# Altium PCB External_IMU.PcbDoc
Units mm, origin at the board's own origin, x right, y up, seen from the top; angles counter-clockwise.
Board outline 60.07 x 30.1 mm, 4 copper layers (Top Layer, GND, PWR, Bottom Layer), stack 0.603 mm thick; 25 components, 19 nets, 124 pads, 62 vias.
Unrouted connection lines stored in the file: 27.
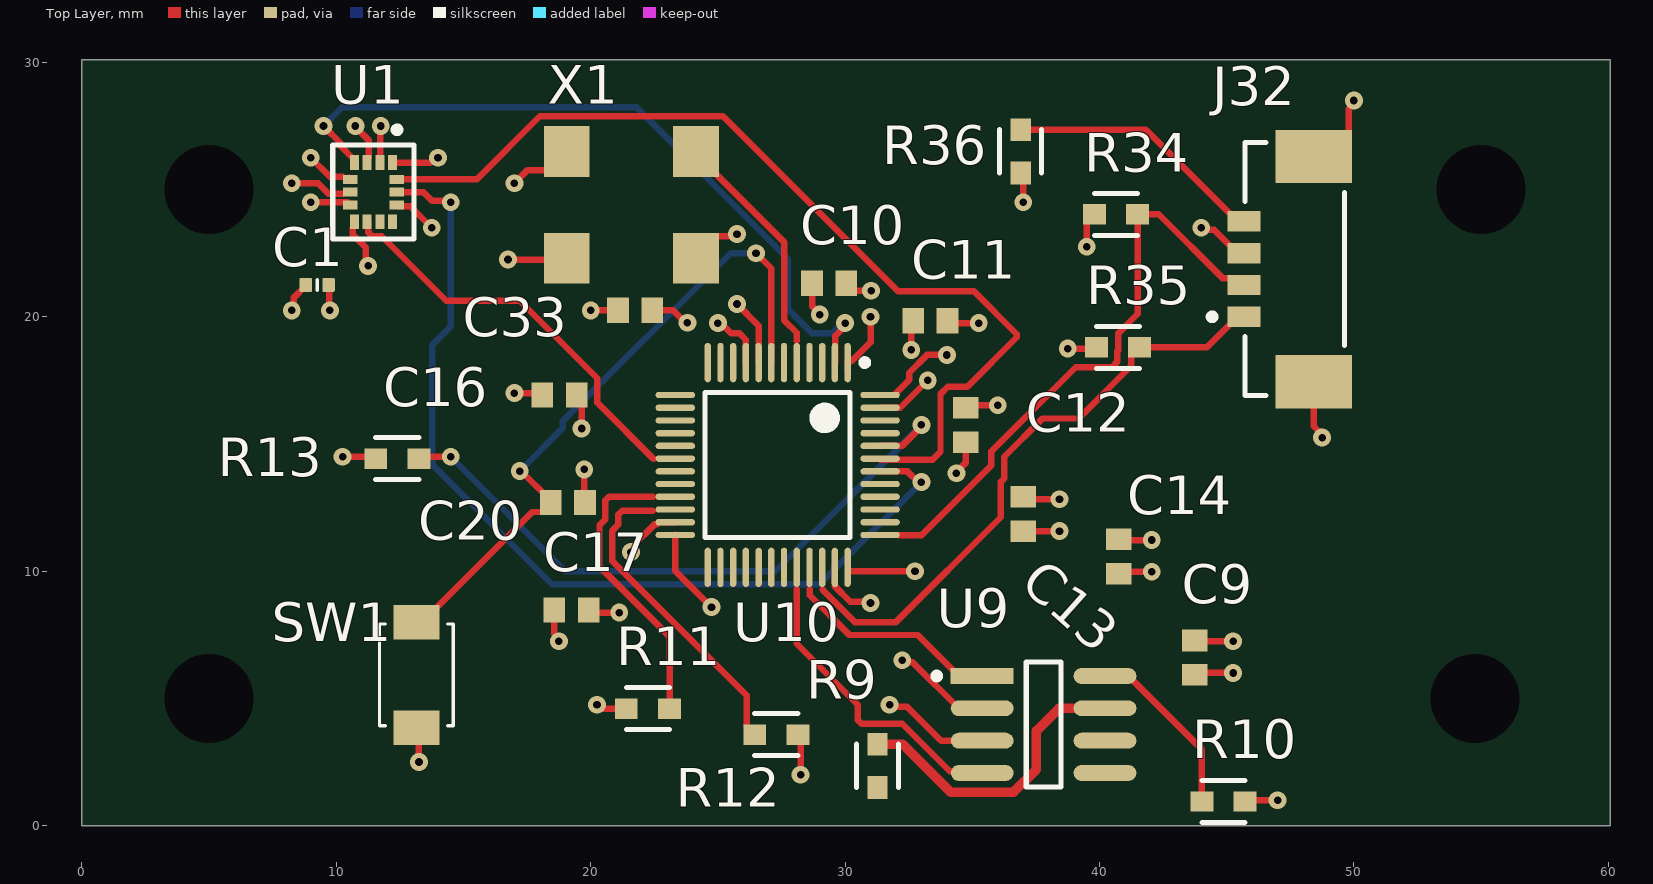
[diagram p0: Top Layer view]
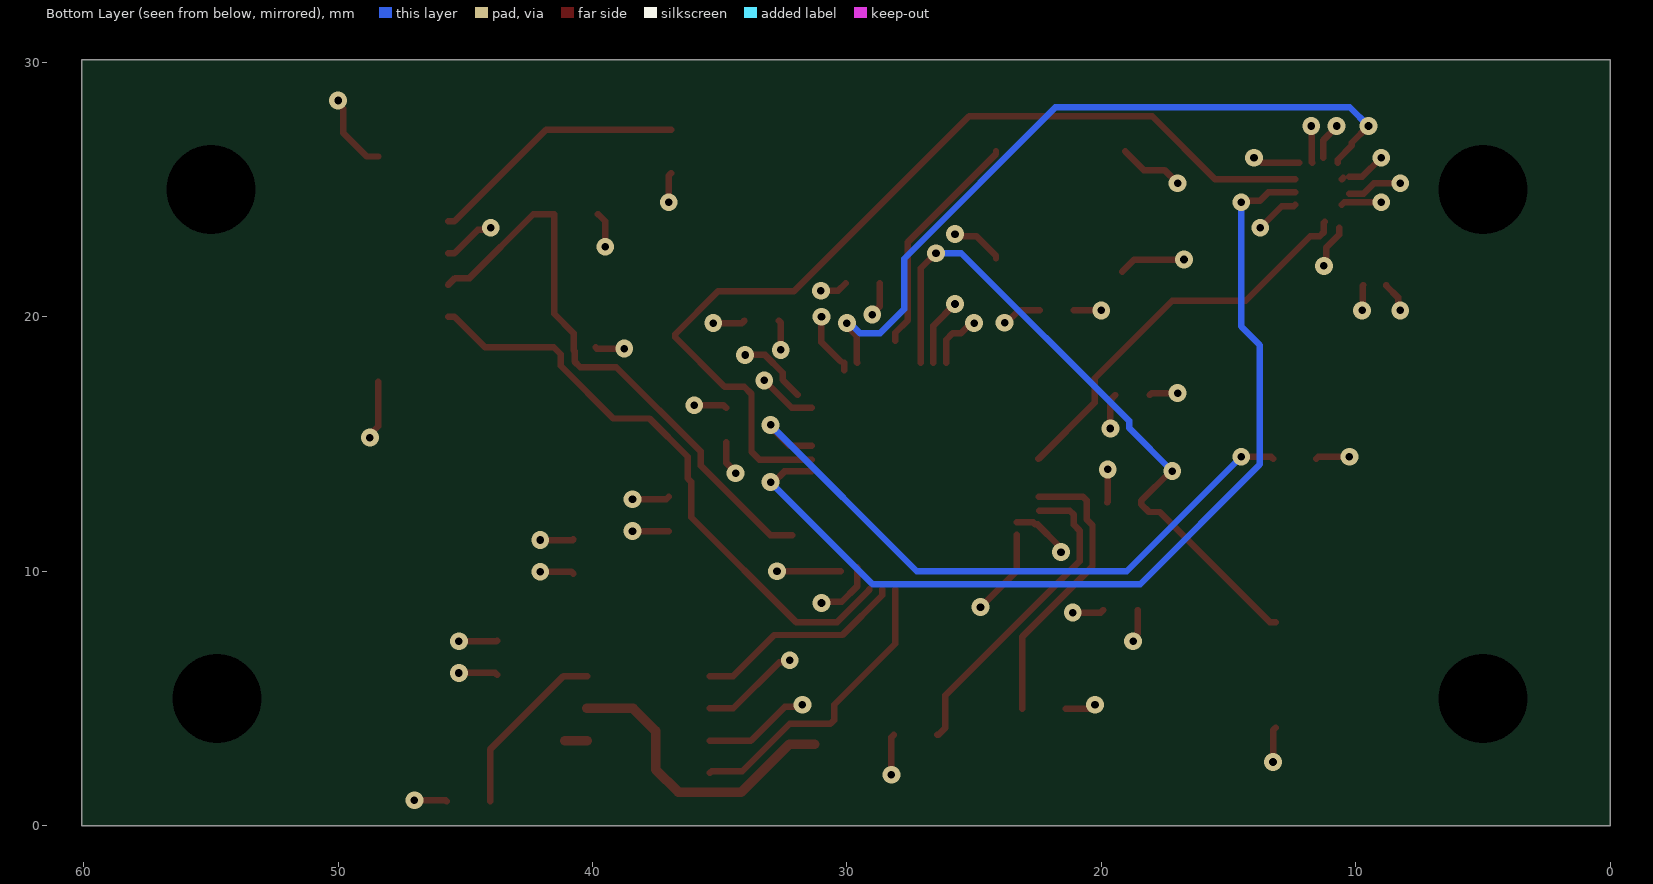
[diagram p1: Bottom Layer view, seen from below]
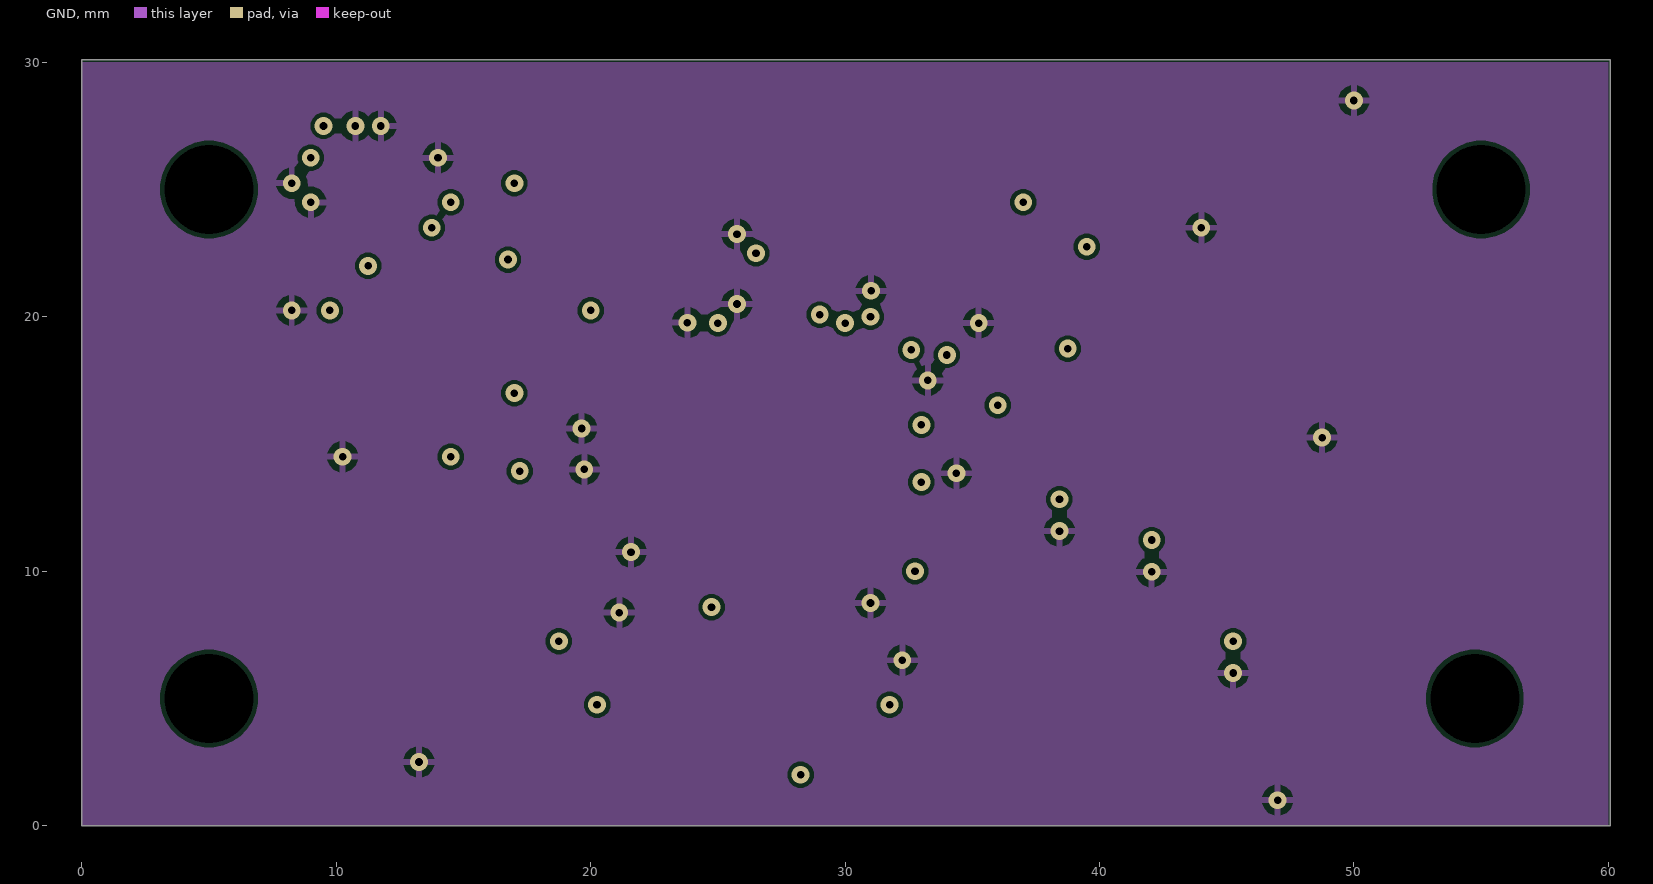
[diagram p2: GND]
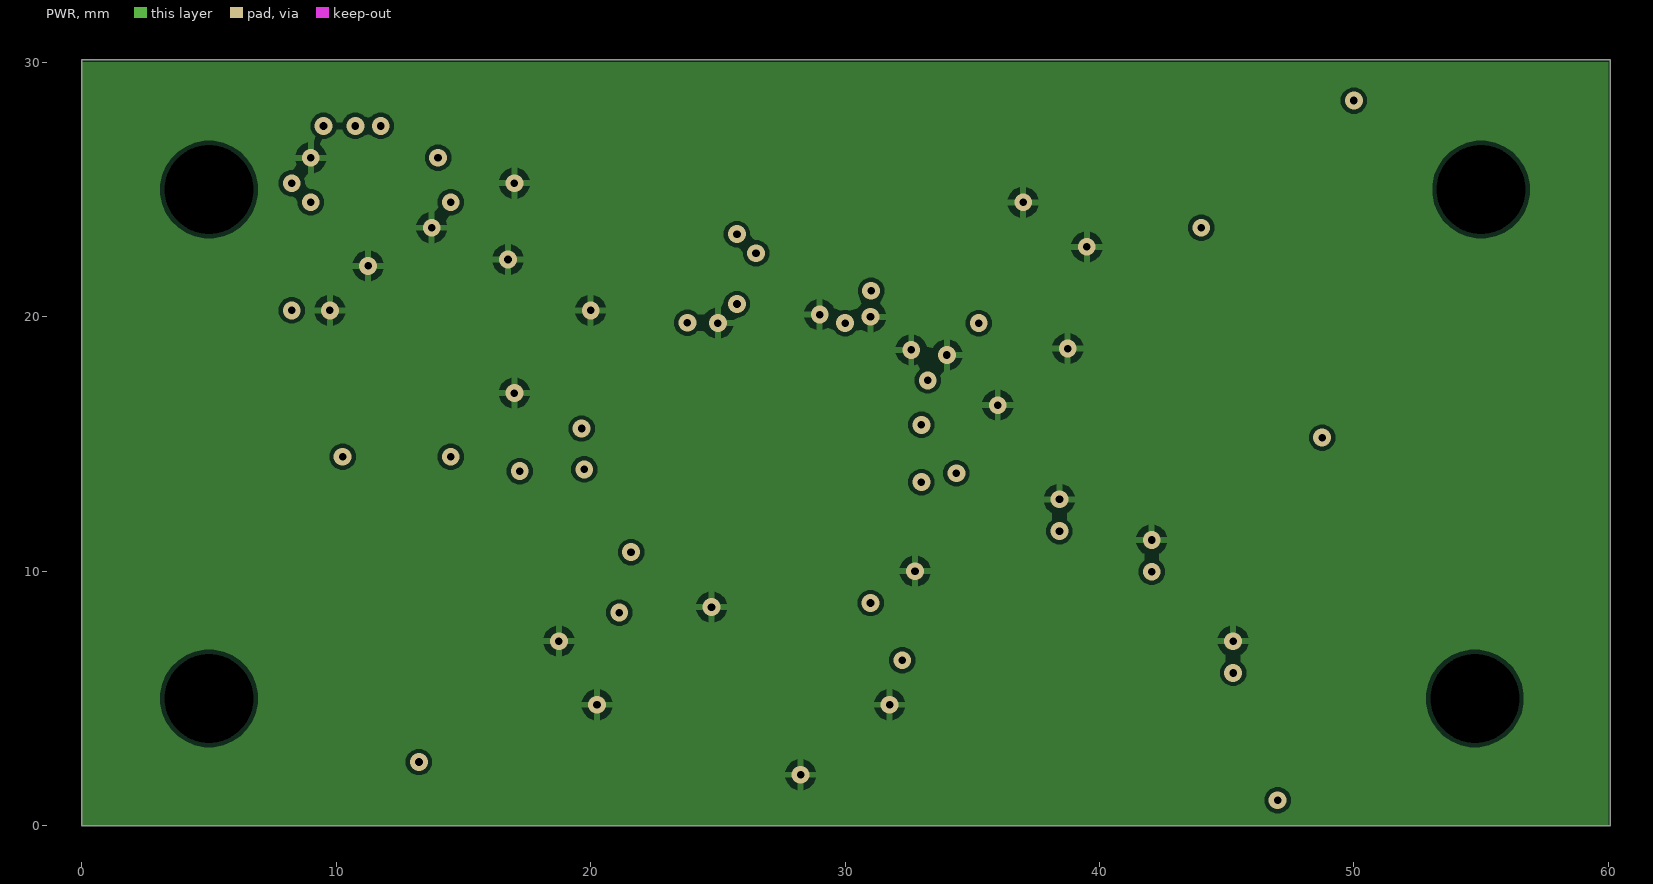
[diagram p3: PWR]
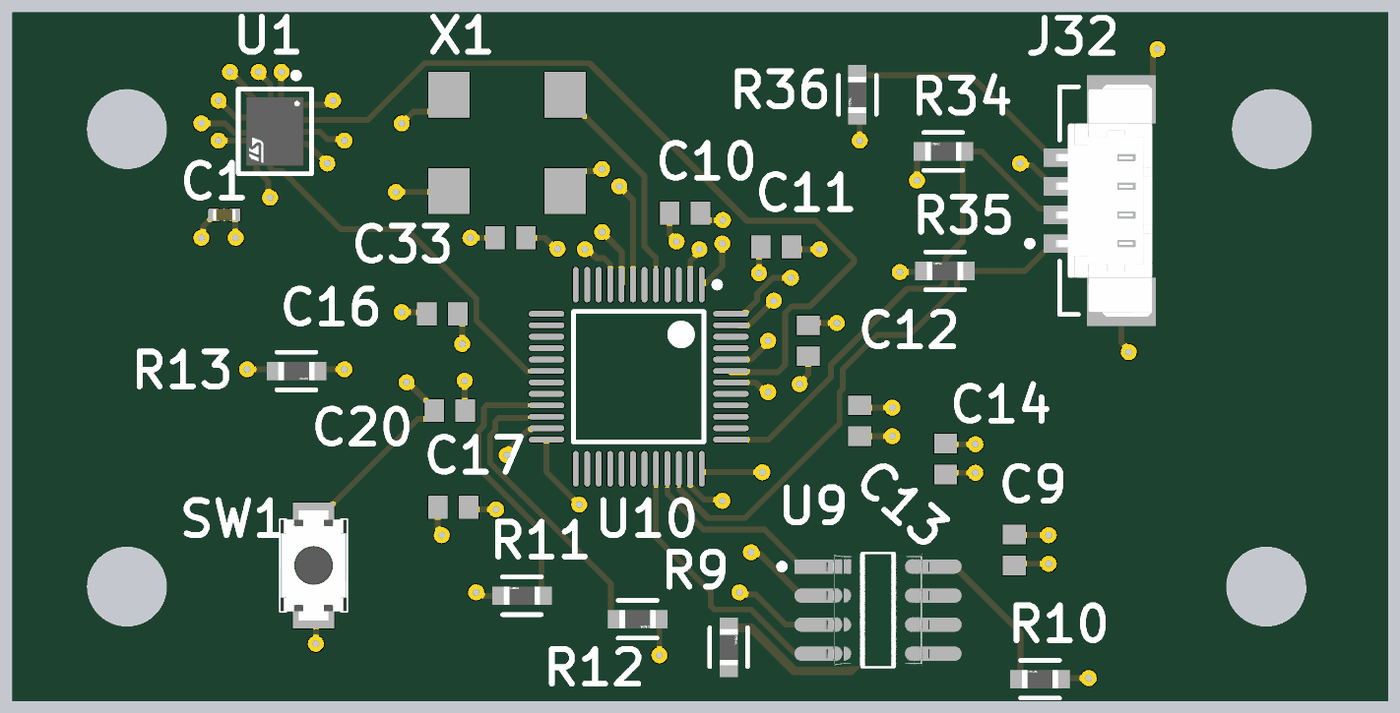
[diagram p4: 3D render of the assembled board from above, using the file's embedded part models]

## Layer stack, top to bottom
Top Solder: solder mask 0.0102, Solder Resist, Dk 3.5
Top Layer: signal copper 0.0356
Dielectric 2: prepreg 0.0711, PP-006, Dk 4.1
GND: signal copper 0.035
Dielectric 1: dielectric 0.32, FR-4, Dk 4.8
PWR: signal copper 0.035
Dielectric 3: prepreg 0.0711, PP-006, Dk 4.1
Bottom Layer: signal copper 0.0356
Bottom Solder: solder mask 0.0102, Solder Resist, Dk 3.5

## Board outline
0,0 0,30.099 60.071,30.099 60.071,0

## Design rules (kind name [scope] priority, off if disabled: settings)
Clearance [All] p1: gap=0.16 ignorepadtopadclearanceinfootprint=TRUE
DiffPairsRouting [All] p1: maxlimit=0.254 minlimit=0.254 mostfreqgap=0.254 toplayer_minwidth=0.381 toplayer_maxwidth=0.381 toplayer_prefwidth=0.381 midlayer1_minwidth=0.381 midlayer1_maxwidth=0.381 midlayer1_prefwidth=0.381 midlayer2_minwidth=0.381 midlayer2_maxwidth=0.381 midlayer2_prefwidth=0.381 bottomlayer_minwidth=0.381 bottomlayer_maxwidth=0.381 bottomlayer_prefwidth=0.381 maxuncoupledlength=12.7
HoleSize [All] p1: absolutevalues=TRUE maxlimit=3.5 minlimit=0.025 maxpercent=80.000 minpercent=20.000
MinimumSolderMaskSliver [All] p1: minsoldermaskwidth=0.075
PolygonConnect [All] p1: connectstyle=Relief reliefconductorwidth=0.254 reliefentries=4 polygonreliefangle="90 Angle" airgapwidth=0.254
RoutingVias [All] p1: holewidth=0.711 width=1.27 viastyle="Through Hole" minholewidth=0.711 minwidth=1.27 maxholewidth=0.711 maxwidth=1.27
SilkToSolderMaskClearance [IsPad] p1: minsilkscreentomaskgap=0.1 clearancetoexposedcopper=TRUE
SolderMaskExpansion [All] p1: expansion=0.05 istentingtop=FALSE
SupplyNets "Schematic Supply Nets_1" [InNet('+3V3')] p1: voltage=0.000
SupplyNets "Schematic Supply Nets" [InNet('GND')] p2: voltage=0.000
Width [All] p1: maxlimit=0.254 minlimit=0.254 preferedwidth=0.254
26 further rules are at their usual default settings.

## Classes and differential pairs
differential pair CAN: +CAN_P -CAN_N

## Components (designator, comment, footprint, x,y, rotation, side; value= is the part's Value field where it differs from the comment)
C1 "Capacitor 100nF +/-20% 10V 0402" CAPC0402(1005)60_L 9.25,21.25 r0 top value=100nF
C9 "100nF" CAPC1608X92X38NL15T08 43.75,6.6 r90 top
C10 "10uF" CAPC1608X92X38NL15T08 29.375,21.325 r180 top
C11 "100nF" CAPC1608X92X38NL15T08 33.35,19.85 r180 top
C12 "100nF" CAPC1608X92X38NL15T08 34.75,15.75 r90 top
C13 "100nF" CAPC1608X92X38NL15T08 37,12.25 r90 top
C14 "100nF" CAPC1608X92X38NL15T08 40.75,10.575 r90 top
C16 "1µF" CAPC1608X92X38NL15T08 18.775,16.925 r180 top
C17 "100nF" CAPC1608X92X38NL15T08 19.25,8.475 r180 top
C20 "100nF" CAPC1608X92X38NL15T08 19.1,12.7 r180 top
C33 "100nF" CAPC1608X92X38NL15T08 21.75,20.25 r180 top
J32 "533980471" FP-533980471-MFG 47.675,21.875 r270 top
R9 "120" FP-AC0603-MFG 31.275,2.35 r90 top
R10 "0" FP-AC0603-MFG 44.875,0.95 r180 top
R11 "4.7k" FP-AC0603-MFG 22.25,4.6 r180 top
R12 "4.7k" FP-AC0603-MFG 27.3,3.575 r0 top
R13 "10k" FP-AC0603-MFG 12.4,14.425 r0 top
R34 "4.7k" FP-AC0603-MFG 40.65,24.025 r180 top
R35 "4.7k" FP-AC0603-MFG 40.725,18.8 r180 top
R36 "0" FP-AC0603-MFG 36.9,26.5 r270 top
SW1 "" SW_TS-1088-AR02016 13.15,5.925 r270 top
U1 "ISM330DHCXTR" FP-LGA-14L-DM00249496-MFG 11.462,24.9 r270 top
U9 "SN65HVD230DR" FP-D0008A-IPC_A 37.8,3.975 r0 top
U10 "STM32F103C8T6" STM-LQFP48_L 27.35,14.175 r270 top
X1 "CMP-003-00036-2" X1G004481001412-Footprint-1 21.6,24.4 r0 top

## Footprints (in the part's own frame and the unit in brackets; to place one, negate y for a bottom-side part, rotate by r counter-clockwise, add the part's x,y. Pads: shape width x height; smd on the part's side, far side on the other; paste and mask are expansions set on the pad)
CAPC0402(1005)60_L [mm] "Chip Capacitor, Body 1.0x0.5mm, Height 0.6mm, IPC High Density"
  rrect25% 0.5x0.55 smd: 1(-0.45,0) 2(0.45,0)
  silkscreen extent 0,-0.2 0,0.2, body extent -0.5,-0.25 0.5,0.25, height 0.6
CAPC1608X92X38NL15T08 [mm] "Chip Capacitor, 2-Leads, Body 1.60x0.80mm, IPC Medium Density"
  rect 0.85x1 smd: 1(-0.675,0) 2(0.675,0)
  body extent -0.87,-0.48 0.87,0.47, height 0.92
FP-533980471-MFG [mm]
  rect 0.8x1.3 smd paste+0 mask+0: 1(1.875,-2) 2(0.625,-2) 3(-0.625,-2) 4(-1.875,-2)
  rect 2.1x3 smd paste+0 mask+0: 5(-4.425,0.75) 6(4.425,0.75)
  silkscreen extent -4.97,-3.37 4.97,1.95, body extent -5.58,-2.75 5.58,2.35, height 0.25
FP-AC0603-MFG [mm]
  rect 0.9x0.8 smd paste+0 mask+0: 1(-0.85,0) 2(0.85,0)
  silkscreen extent -0.85,-0.82 0.85,0.82, body extent -1.4,-0.55 1.4,0.55, height 0.25
FP-D0008A-IPC_A [mm]
  rect 2.469x0.622 smd paste+0 mask+0: 1(-2.414,1.905)
  rrect100% 2.469x0.622 smd paste+0 mask+0: 2(-2.414,0.635) 3(-2.414,-0.635) 4(-2.414,-1.905) 5(2.414,-1.905) 6(2.414,-0.635) 7(2.414,0.635) 8(2.414,1.905)
  silkscreen extent -4.32,-2.45 0.68,2.45, body extent -4.15,-2.95 4.15,2.95, height 0.25
FP-LGA-14L-DM00249496-MFG [mm]
  rect 0.575x0.35 smd paste-1000 mask+0: 1(-1.162,0.75) 2(-1.162,0.25) 3(-1.162,-0.25) 4(-1.162,-0.75) 8(1.162,-0.75) 9(1.162,-0.25) 10(1.162,0.25) 11(1.162,0.75)
  rect 0.35x0.575 smd paste-1000 mask+0: 5(-0.5,-0.913) 6(0,-0.913) 7(0.5,-0.913) 12(0.5,0.913) 13(0,0.913) 14(-0.5,0.913)
  silkscreen extent -2.57,-1.6 1.85,1.6, body extent -2.05,-1.8 2.05,1.8, height 0.25
STM-LQFP48_L [mm] "QFP, 48-Leads, Body 7x7mm, Pitch 0.5mm, IPC High Density"
  oval 1.55x0.25 smd: 1(-4.025,2.75) 2(-4.025,2.25) 3(-4.025,1.75) 4(-4.025,1.25) 5(-4.025,0.75) 6(-4.025,0.25) 7(-4.025,-0.25) 8(-4.025,-0.75) 9(-4.025,-1.25) 10(-4.025,-1.75) 11(-4.025,-2.25) 12(-4.025,-2.75) 25(4.025,-2.75) 26(4.025,-2.25) 27(4.025,-1.75) 28(4.025,-1.25) 29(4.025,-0.75) 30(4.025,-0.25) 31(4.025,0.25) 32(4.025,0.75) 33(4.025,1.25) 34(4.025,1.75) 35(4.025,2.25) 36(4.025,2.75)
  oval 0.25x1.55 smd: 13(-2.75,-4.025) 14(-2.25,-4.025) 15(-1.75,-4.025) 16(-1.25,-4.025) 17(-0.75,-4.025) 18(-0.25,-4.025) 19(0.25,-4.025) 20(0.75,-4.025) 21(1.25,-4.025) 22(1.75,-4.025) 23(2.25,-4.025) 24(2.75,-4.025) 37(2.75,4.025) 38(2.25,4.025) 39(1.75,4.025) 40(1.25,4.025) 41(0.75,4.025) 42(0.25,4.025) 43(-0.25,4.025) 44(-0.75,4.025) 45(-1.25,4.025) 46(-1.75,4.025) 47(-2.25,4.025) 48(-2.75,4.025)
  silkscreen extent -4.15,-2.85 2.85,3.55, body extent -3.5,-3.5 3.5,3.5, height 1.6
SW_TS-1088-AR02016 [mm]
  rect 1.35x1.8 smd: 1(-2.075,0) 2(2.075,0)
  silkscreen extent -2,-1.45 2,1.45, body extent -2.4,-1.45 2.4,1.45, height 2
X1G004481001412-Footprint-1 [mm]
  rect 1.8x2 smd: 1(-2.54,-2.1) 2(2.54,-2.1) 3(2.54,2.1) 4(-2.54,2.1)
  body extent -3.5,-2.5 3.5,2.5, height 1.3

## Part data
C1: library part CMP-001-00061-3, "Chip Capacitor, 100nF +/-20%, 10V, 0402, Thickness 0.6 mm", Case/Package=0402, Max Operating Temperature=85°C, Min Operating Temperature=-55°C, Tolerance=20%, Voltage Rating=10V, Mounting Technology=SMT, Pins=2
C9 C10 C11 C12 C13 C14 C16 C17 C20 C33: library part CMP-2006-01140-1, "Generic Capacitor 0603", Manufacturer=Generic
J32: library part CMP-04776-000105-1, "CONN HEADER SMD 4POS 1.25MM", Ambient Temperature Range High=+105°C, Ambient Temperature Range Low=-40°C, Current Rating=1A, Manufacturer=Molex, Package=0, Temperature="-40°C to +105°C", Voltage Rating=125V, Automotive=No, Category=Conn, ComponentLink2Description=Datasheet, ComponentLink2URL=https://www.molex.com/pdm_docs/ps/PS-51021-024-001.pdf, Conn Gender=Male, Conn Orientation=Vertical, Contact Material=Tin, Device Class L1=Connectors, Device Class L2="Headers and Wire Housings", Device Class L3=unset, Digikey Description="CONN HEADER SMD 4POS 1.25MM", Footprint Url=https://www.molex.com/pdm_docs/sd/533980471_sd.pdf, Height=5.1mm, Lead Free=Yes, Manufacturer Part Number=533980471, Number Of Contacts=4, Number Of Rows=1, Octopart=https://octopart.com/53398-0471-molex-655296, Pitch=1.25mm, RoHS=TRUE, Standoff Height=0.05mm, Temperature Range High=+105°C, Temperature Range Low=-40°C
R9 R10 R11 R12 R13 R34 R35 R36: library part CMP-03412-004865-2, "Generic RES 0603", Case/Package=0603
  R9: Resistance=120
  R10 R36: Resistance=0
  R11 R12 R34 R35: Resistance=4.7k
  R13: Resistance=10k
SW1: library part CMP-005-000000-1, "50mA 4mm 100MÎ© 100,000 Times 12V 160gf 3mm 2mm Round Button Vertical welding SPST SMD Tactile Switches ROHS", Package=Package, Check_prices=https://www.snapeda.com/parts/TS-1088-AR02016/Xunpu/view-part/?ref=eda, Component Type=Standard, Design Item ID=TS-1088-AR02016, MF=Xunpu, MP=TS-1088-AR02016, Pin Count=2, SnapEDA_Link=https://www.snapeda.com/parts/TS-1088-AR02016/Xunpu/view-part/?ref=snap, Source=TS-1088-AR02016.SchLib
U1: library part CMP-12177-000014-1, "INEMO INERTIAL MODULE: ALWAYS-ON"
U9: library part CMP-0315-00015-3, "IC TRANSCEIVER HALF 1/1 8SOIC", Case/Package=D, Max Operating Temperature=85°C, Max Supply Current=17mA, Max Supply Voltage=3.6V, Min Operating Temperature=-40°C, Min Supply Voltage=3V, Operating Supply Voltage=3.3V, Package Quantity=1, Contact Plating=Gold, Data Rate=1Mbps, Lead Free="Lead Free", Nominal Supply Current=17mA, Number of Drivers=1, Number of I/Os=2, Number of Pins=8, Number of Receive Buffers=1, Number of Receivers=1, Number of Transceivers=1, Number of Transmit Buffers=1, Packaging="Tape and Reel", Radiation Hardening=No, REACH SVHC="No SVHC", Termination=SMD/SMT, Weight=0.002561oz
U10: library part CMP-0237-00215-3, "ARM Cortex-M3 32-bit MCU, 64 KB Flash, 20 KB Internal RAM, 37 I/Os, 48-pin LQFP, -40 to 85 degC, Tray", I/Os (High Current)=37, Operating Frequency(F) (Processor speed) (MHz)=72, Supply Voltage(Vcc) min (V)=2, A/D Converter="2x12-bit (10 Channel)", ComponentLink1Description="Manufacturer URL", ComponentLink1URL=http://www.st.com/web/en/home.html, ComponentLink2Description=Datasheet, ComponentLink2URL=http://www.st.com/st-web-ui/static/active/en/resource/technical/document/datasheet/CD00161566.pdf, ComponentLink3Description="Package Specification", ComponentLink3URL=http://www.st.com/st-web-ui/static/active/en/resource/technical/document/datasheet/DM00058181.pdf, Core="ARM Cortex-M3", DatasheetVersion="Rev. 16", FLASH Size (Prog) (kB)=64, Internal RAM Size (kB)=20, Mounting Technology="Surface Mount", PackageDescription="48-Pin Low Profile Quad Flat Package, 7 x 7 mm Body, 0.5 mm Pitch", PackageReference=LQFP48, PackageVersion="Rev. 6, 06/2013", Packing=Tray, PartNumber=STM32F103C8T6
X1: library part CMP-003-00032-1, "Crystal Oscillator 8MHz 1.6V to 3.6V 15pF 4-Pin SMD T/R", Frequency=8MHz, Load Capacitance=15pF, Max Operating Temperature=85°C, Min Operating Temperature=-40°C, Component Type=Standard, Design Item ID=CMP-003-00036-2, Mounting Technology="Surface Mount", Pins=4, Source="Components - 07.02.26 - 15.45.SchLib"

## Free pads (board coordinates)
  round 1.524 hole 3.5 unplated: 2(5,5) 2(5,25) 2(54.75,5) 2(55,25)

## Via types
v1: diameter 0.7, hole 0.3, Top Layer to Bottom Layer, 62 vias

## Nets (pads, with @x,y where several pads share a name; then routed paths per layer and width w, separated by ;. In a path a pad name is that pad's centre, name@x,y a point inside that pad or via, vN(x,y) a via of type N, cw(c..) or ccw(c..) an arc to the next point about the centre after c; other vN are vias at no path point)
+3V3: C1.2 C9.2 C10.2 C11.2 C12.2 C13.2 C14.2 C16.2 C17.2 C33.2 R11.2 R12.2 R34.2 R35.2 R36.2 U1.5 U1.8 U1.12 U9.3 U10.1 U10.9 U10.24 U10.36 U10.48 X1.1 X1.4 | length 47.2
  Top Layer w0.254: v1(9,26.25) 9.002,26.25 9.752,25.5 10.25,25.5 ; C1.2 9.725,21.225 9.725,20.275 v1(9.75,20.25) ; U1.5@10.494,25.456 U1.5 ; U1.8@10.656,23.5 10.656,23.222 11.165,22.714 11.165,22.085 v1(11.25,22) ; U1.12 12.431,24.344 12.906,24.344 v1(13.75,23.5) ; v1(16.75,22.25) 18.703,22.25 X1.1@19.177,21.776 ; v1(17,17) 18.025,17 C16.2 ; v1(17,25.25) 17.517,25.767 18.327,25.767 X1.4 ; C17.2 18.575,7.546 18.75,7.371 v1(18.75,7.25) ; v1(20,20.25) C33.2 ; v1(20.25,4.75) 20.371,4.75 20.521,4.6 R11.2 ; U10.24 23.325,10.012 v1(24.75,8.587) ; v1(25,19.75) 25.121,19.75 25.515,19.356 25.845,19.356 26.1,19.101 U10.9 ; R12.2 28.25,3.475 v1(28.25,2) ; C10.2 28.7,20.421 29,20.121 v1(29,20.087) ; U10.1@30.1,17.906 U10.1 ; 30.25,10 v1(32.75,10) ; 30.25,18.25 31,19 v1(31,20) ; v1(31.75,4.75) 31.835,4.665 32.446,4.665 33.771,3.34 U9.3 ; U10.48@31.927,16.927 32.519,17.519 32.519,17.803 33.216,18.5 v1(34,18.5) ; v1(32.6,18.7) 32.6,19.775 C11.2 ; C12.2 34.85,16.525 v1(36,16.525) ; R36.2 37,25.55 v1(37,24.5) ; C13.2 37.1,12.825 v1(38.425,12.825) ; v1(38.75,18.75) 39.825,18.75 R35.2 ; v1(39.5,22.75) 39.5,23.752 39.773,24.025 R34.2 ; C14.2 40.775,11.225 v1(42.05,11.225) ; C9.2 43.775,7.25 v1(45.25,7.25)
CAN_N: U9.6 | length 0.9
  Top Layer w0.381: U9.6 U9.6@41.09,3.34
CAN_P: R9.2 U9.7 | length 12
  Top Layer w0.381: R9.2 32.264,3.2 34.15,1.314 36.623,1.314 37.515,2.207 37.515,3.718 38.408,4.61 U9.7
CAN_RX: U9.4 U10.32 | length 11.9
  Top Layer w0.254: 28.1,9.284 28.1,7.15 30.5,4.75 30.5,4.149 30.649,4 32.25,4 34.11,2.14 35.316,2.14 U9.4
CAN_TX: U9.1 U10.33 | length 8.3
  Top Layer w0.254: 28.608,9.284 28.608,9.058 30.174,7.492 32.851,7.492 34.463,5.88 U9.1
GND: C1.1 C9.1 C10.1 C11.1 C12.1 C13.1 C14.1 C16.1 C17.1 C20.1 C33.1 J32.3 J32.5 J32.6 R10.1 R13.1 SW1.2 U1.1 U1.2 U1.3 U1.6 U1.7 U9.2 U10.8 U10.23 U10.35 U10.47 X1.2 | length 50.6
  Top Layer w0.254: v1(8.25,20.25) 8.335,20.335 8.335,20.76 8.8,21.225 C1.1 ; v1(8.25,25.25) 9.284,25.25 9.69,24.844 10.25,24.844 ; v1(9,24.5) 10.45,24.5 U1.7 ; v1(10.25,14.5) 11.475,14.5 R13.1 ; v1(10.75,27.5) 10.75,27.466 11.268,26.948 U1.3@11.268,26.25 ; U1.2 11.731,26.081 11.731,27.481 v1(11.75,27.5) ; U1.1 13.692,26.062 13.879,26.25 v1(14,26.25) ; SW1.2 13.25,3.75 v1(13.25,2.5) ; C16.1 19.642,16.733 v1(19.642,15.608) ; v1(19.75,14) 19.75,12.725 C20.1 ; C17.1 20.026,8.374 v1(21.124,8.374) ; v1(21.586,10.75) 21.672,10.835 21.672,11.004 22.504,11.837 22.591,11.837 22.679,11.925 U10.23 ; C33.1 23.25,20.25 23.731,19.769 v1(23.803,19.769) ; X1.2 24.14,22.4 24.913,23.173 25.673,23.173 v1(25.75,23.25) ; v1(25.75,20.5) 26.6,19.65 U10.8 ; U10.35 29.602,10.148 29.602,9.398 30.199,8.801 30.949,8.801 v1(31,8.75) ; C10.1 30.05,21.321 30.348,21.023 v1(31.023,21.023) ; U10.47 31.711,16.425 31.717,16.419 32.169,16.419 v1(33.25,17.5) ; v1(32.25,6.5) 32.335,6.415 32.658,6.415 34.463,4.61 U9.2 ; C11.1 34.125,19.75 v1(35.25,19.75) ; v1(34.375,13.85) 34.375,13.894 34.75,14.269 C12.1 ; C13.1 v1(38.425,11.575) ; C14.1 40.825,9.975 v1(42.05,9.975) ; C9.1 43.825,6 v1(45.25,6) ; v1(44,23.5) 44.085,23.415 44.51,23.415 45.425,22.5 J32.3 ; R10.1 45.775,1 v1(47,1) ; J32.6 48.425,15.696 48.75,15.371 v1(48.75,15.25) ; J32.5 48.875,26.3 49.798,27.223 49.798,28.177 50,28.379 v1(50,28.5)
INT1: U1.4 U10.2 | length 29.5
  Top Layer w0.254: v1(9.5,27.5) 10.155,26.845 10.155,26.732 10.712,26.175 U1.4 ; U10.2 29.606,18.206 29.606,19.235 30,19.629 v1(30,19.75)
  Bottom Layer w0.254: v1(9.5,27.5) 10.231,28.231 21.803,28.231 27.75,22.284 27.75,20.303 28.697,19.356 29.485,19.356 29.879,19.75 v1(30,19.75)
INT2: U1.9 U10.18 | length 15.9
  Top Layer w0.254: U1.9 11.25,23.7 11.25,23.331 11.419,23.163 11.787,23.163 14.319,20.631 17.207,20.631 20.256,17.583 20.256,16.628 22.472,14.412
NetC20_2: C20.2 SW1.1 U10.7 | length 26.6
  Top Layer w0.254: SW1.1 13.375,8 17.702,12.327 18.127,12.327 18.425,12.625 C20.2 18.425,12.775 17.267,13.933 v1(17.209,13.933) ; v1(26.5,22.5) 27.094,21.906 27.094,18.206 U10.7
  Bottom Layer w0.254: v1(17.209,13.933) 18.911,15.634 18.911,15.911 25.5,22.5 v1(26.5,22.5)
NetJ32_4: J32.4 R36.1 | length 10.3
  Top Layer w0.254: R36.1 41.825,27.35 45.425,23.75 J32.4
NetR10_2: R10.2 U9.8 | length 7
  Top Layer w0.254: U9.8 41.137,5.88 44.025,2.992 R10.2
NetR13_2: R13.2 U10.44 | length 26
  Top Layer w0.254: R13.2 13.325,14.5 v1(14.5,14.5) ; U10.44 32.241,14.925 33,15.684 v1(33,15.75)
  Bottom Layer w0.254: v1(14.5,14.5) 19,10 27.25,10 v1(33,15.75)
NetU10_5: U10.5 X1.3 | length 9.1
  Top Layer w0.254: X1.3 24.14,26.4 27.602,22.938 27.602,19.866 28.1,19.368 28.1,19.066
SCL: R11.1 U10.21 | length 11.4
  Top Layer w0.254: 22.459,12.933 20.73,12.933 20.581,12.784 20.581,12.042 20.347,11.808 20.347,10.184 23.1,7.432 R11.1
"SCL CLK": U1.13 U10.42 | length 37.5
  Top Layer w0.254: U1.13@12.375,24.892 13.432,24.892 13.769,24.555 14.445,24.555 v1(14.5,24.5) ; U10.42 U10.42@32.014,13.925 ; U10.42@32.016,13.923 32.456,13.923 32.879,13.5 v1(33,13.5)
  Bottom Layer w0.254: v1(14.5,24.5) 14.5,19.621 13.769,18.89 13.769,14.197 18.474,9.492 28.992,9.492 v1(33,13.5)
SDA: R12.1 U10.22 | length 12.5
  Top Layer w0.254: 22.438,12.378 21.238,12.378 21.089,12.229 21.089,11.832 20.855,11.598 20.855,10.395 26.127,5.123 26.127,3.848 26.4,3.575 R12.1
"SDA DATA": U1.14 U10.43 | length 37.8
  Top Layer w0.254: U1.14 15.521,25.4 18.002,27.881 25.198,27.881 32.079,21 35.066,21 36.75,19.316 36.75,19.19 34.81,17.25 34.034,17.25 33.75,16.966 33.75,14.69 33.438,14.378 U10.43@31.375,14.378
SW_CLK: J32.2 R34.1 U10.37 | length 23.1
  Top Layer w0.254: 32.15,11.419 33.016,11.419 35.75,14.153 35.75,14.707 39.062,18.019 40.483,18.019 40.706,18.242 40.706,18.649 40.744,18.687 40.744,19.358 41.5,20.114 R34.1 42.331,24.025 44.833,21.523 45.402,21.523 J32.2
SW_DIO: J32.1 R35.1 U10.34 | length 23.7
  Top Layer w0.254: 29.116,9.284 29.116,9.268 30.384,8 32,8 36.119,12.119 36.119,13.508 36.258,13.647 36.258,14.497 37.762,16.001 39.184,16.001 41.252,18.07 41.252,18.527 41.525,18.8 R35.1 44.225,18.8 45.425,20 J32.1
pads on no net: R9.1 U1.10 U1.11 U9.5 U10.3 U10.4 U10.6 U10.10 U10.11 U10.12 U10.13 U10.14 U10.15 U10.16 U10.17 U10.19 U10.20 U10.25 U10.26 U10.27 U10.28 U10.29 U10.30 U10.31 U10.38 U10.39 U10.40 U10.41 U10.45 U10.46

## Polygon pours and split planes (outlines as drawn)
GND on GND "GND_L02_P000" (solid, pour order 0): 0,30 0,0 60,0 60,30
+3V3 on PWR "+3V3_L03_P001" (solid, pour order 1): 0,30 0,0 60,0 60,30